# EAGLE board APRS board R2 (EAGLE 6.4)
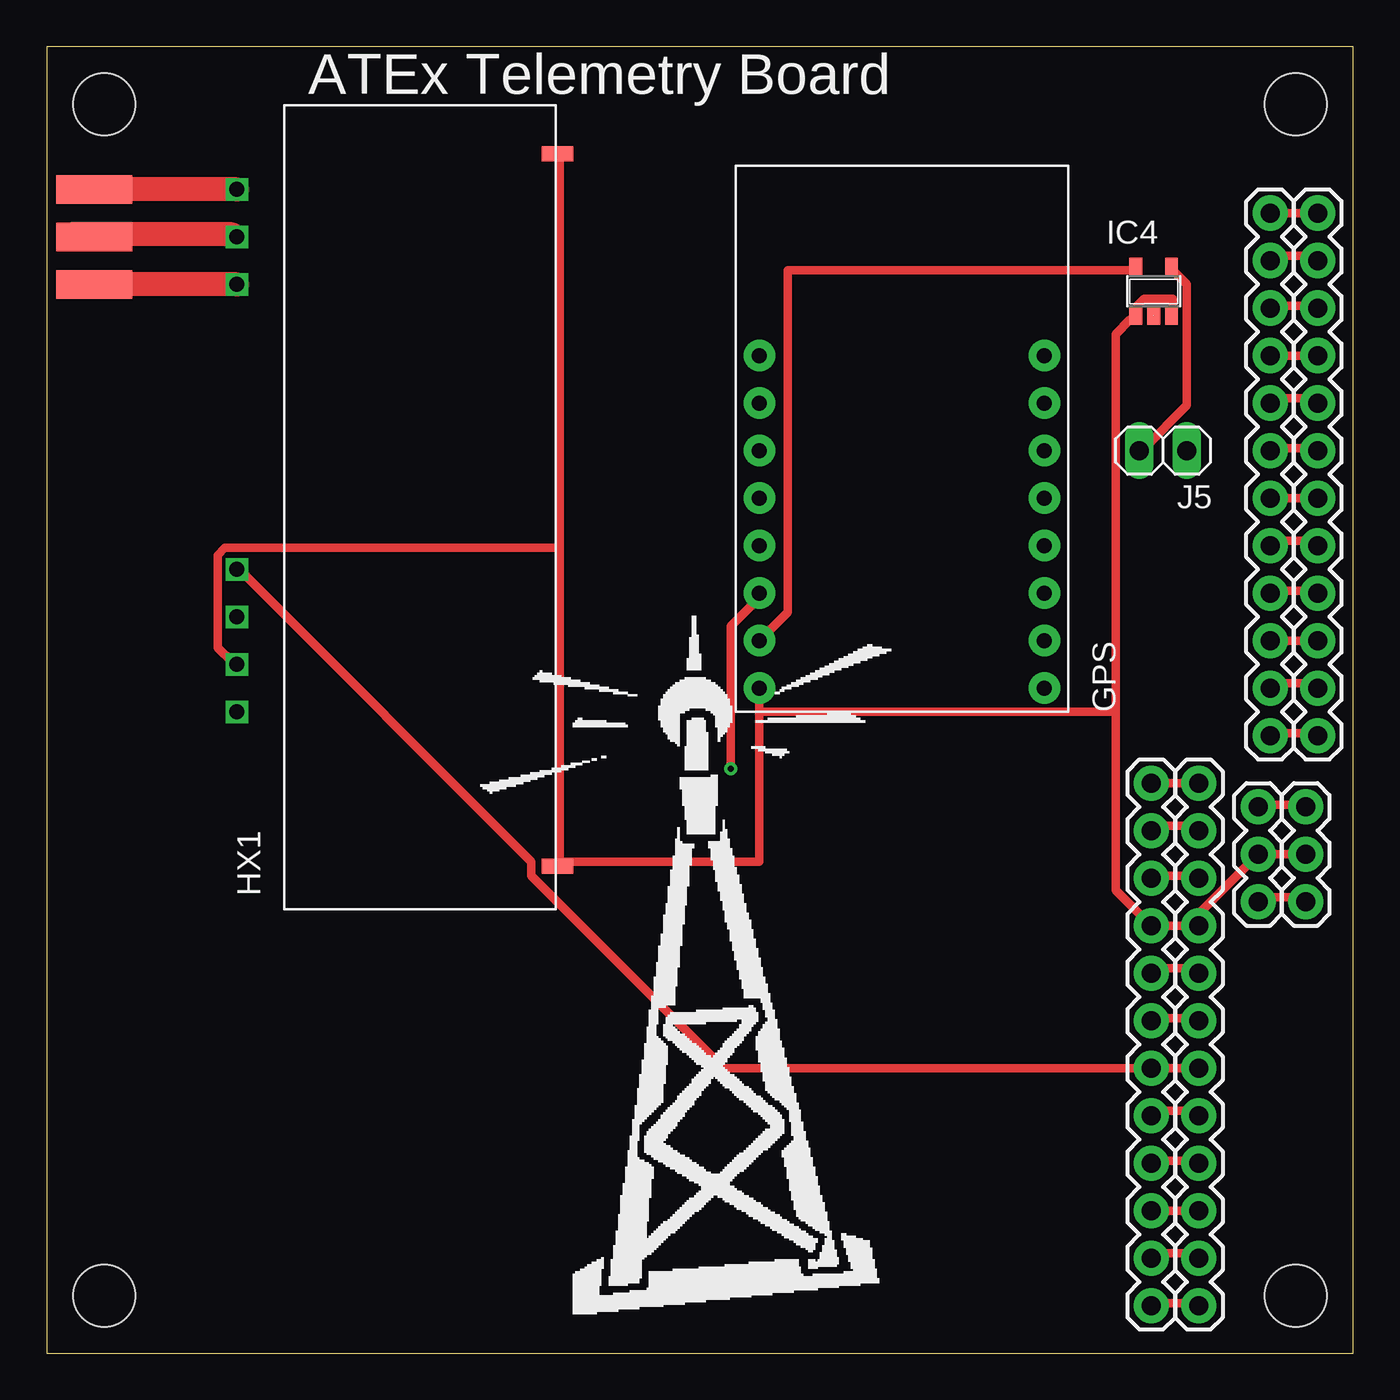
[diagram p0: board, top side]
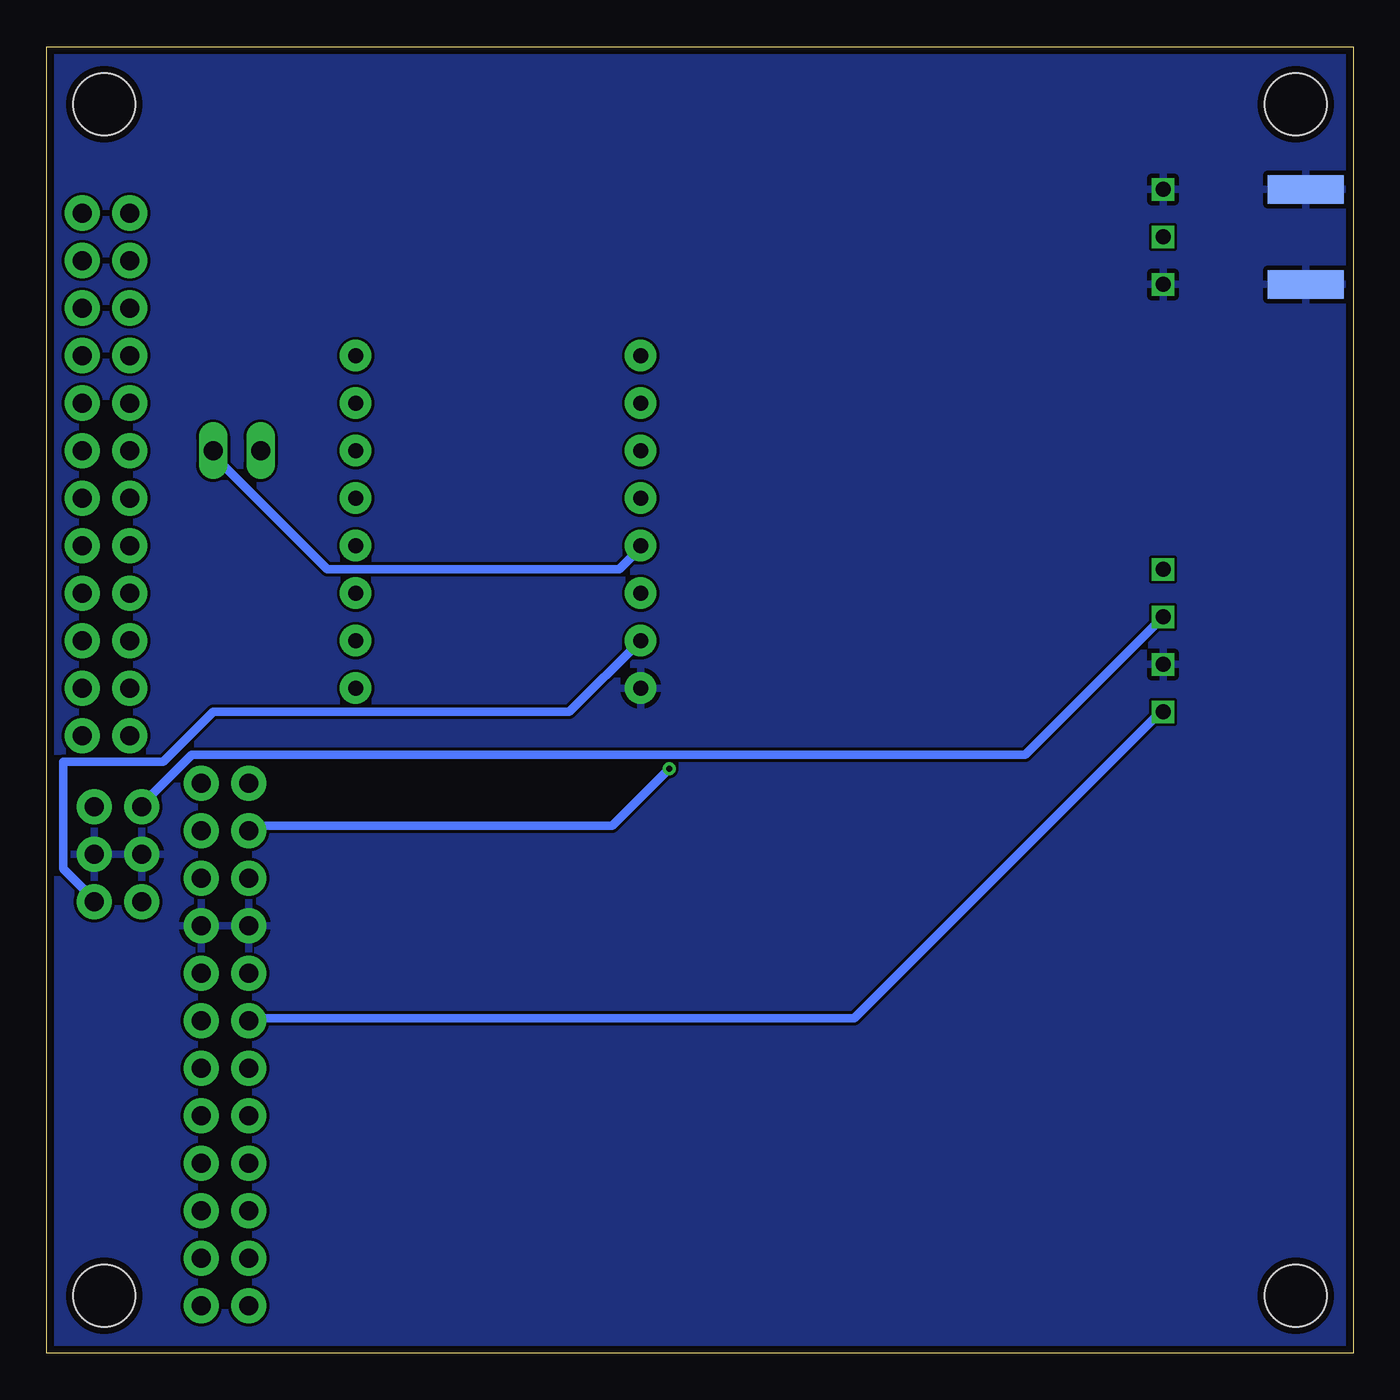
[diagram p1: board, bottom side, seen from below]

Size 69.85 x 69.85 mm. Coordinates in mm from the lower left corner, seen from the top.
Outline: 0,0 69.85,0 69.85,69.85 0,69.85 0,0
Copper layers (1*16): Top 0.0356mm / dielectric 1.5011mm / Bottom 0.0356mm
Design rules "OSHpark *": minimum track width 18mil, minimum drill 13mil, track to track 6mil, track to pad 6mil, pad to pad 6mil, via to via 6mil, smd to smd 6mil, copper to edge 15mil, drill to drill 6mil, minimum pad ring 7mil, minimum via ring 7mil, stop-mask expansion 4mil, vias tented up to drill 0mil, thermal gap 10mil
Net classes: 1 vcc: width 0.254 mm; 2 20: width 0.508 mm; 3 30: width 0.762 mm

## Footprints (pad centres in the part's own frame; a part is rotated, then mirrored left to right if it is on the bottom)
VENUS638FLPX = drill 0.8 pad 1.676: 3.3V 3.81,16.51; CLK 13.97,16.51; CS 11.43,16.51; GND 1.27,16.51; GND2 3.81,1.27; MISO 16.51,16.51; MOSI 19.05,16.51; NAV 6.35,1.27; PPS 8.89,1.27; RX0 8.89,16.51; RX1 11.43,1.27; SCL 16.51,1.27; SDA 19.05,1.27; TX0 6.35,16.51; TX1 13.97,1.27; VBAT 1.27,1.27
SOT23-5 = smd 0.69 x 0.99: 1 -0.95,-1.29; 2 0,-1.29; 3 0.95,-1.29; 4 0.95,1.3; 5 -0.95,1.3
1X02 = drill 1.016 long: 1 -1.27,0; 2 1.27,0
SMA-EDGE = smd 1.524 x 4.064: GND@0 0,0; GND@1 5.08,0; SIG 2.54,0 | smd 1.524 x 4.064 bottom: GND@2 0,0; GND@3 5.08,0
1X12 = drill 1.016 pad 1.88: 1 0,0; 2 2.54,0; 3 5.08,0; 4 7.62,0; 5 10.16,0; 6 12.7,0; 7 15.24,0; 8 17.78,0; 9 20.32,0; 10 22.86,0; 11 25.4,0; 12 27.94,0
HX1 = drill 0.8 square: 0V 25.4,-8.89; EN 20.32,-8.89; RFGND1 0,-8.89; RFGND2 5.08,-8.89; RFOUT 2.54,-8.89; TXD 27.94,-8.89; VCC 22.86,-8.89 | smd 0.813 x 1.676: BODYGND1 -1.905,8.255; BODYGND2 36.195,8.255
1X03 = drill 1.016 pad 1.88: 1 0,0; 2 2.54,0; 3 5.08,0
STAND-OFF = hole 3.302: 0,0

## Placement (x,y rotation side)
GPS  VENUS638FLPX  [VENUS638FLPX]  54.61,34.29 90 top
IC4  ON M74VHC1GT125DT1G  [SOT23-5]  59.18,56.77 0 top
J5  J5MM  [1X02]  59.69,48.26 180 top
J$1  SMA_EDGE  [SMA-EDGE]  2.54,57.15 90 top
JP1  [1X12]  59.05,2.54 90 top
JP4  [1X12]  67.94,33.02 90 top
JP7  [1X12]  61.59,2.54 90 top
JP8  [1X12]  65.41,33.02 90 top
M2  HX1  [HX1]  19.05,62.23 270 top
POWERCONNECTION  [1X03]  64.77,24.13 90 top
POWERCONNECTION1  [1X03]  67.31,24.13 90 top
STANDOFF1  STAND-OFF  [STAND-OFF]  66.78,3.07 0 top
STANDOFF2  STAND-OFF  [STAND-OFF]  66.78,66.78 0 top
STANDOFF3  STAND-OFF  [STAND-OFF]  3.07,66.78 0 top
STANDOFF4  STAND-OFF  [STAND-OFF]  3.07,3.07 0 top

## Library data of the parts
GPS M2 = trackuino
IC4 = 74xx-little-us
J5 = pinhead
J$1 POWERCONNECTION POWERCONNECTION1 = SparkFun-Connectors
JP1 JP4 JP7 JP8 = SparkFun
STANDOFF1-STANDOFF4 = SparkFun-Electromechanical

## Nets
+3V3: GPS.3.3V IC4.5 POWERCONNECTION1.1 POWERCONNECTION.1
+5V: M2.VCC POWERCONNECTION1.3 POWERCONNECTION.3
A0: JP4.8 JP8.8
A1: JP4.7 JP8.7
A2: JP4.6 JP8.6
A3: JP4.5 JP8.5
A4: JP4.2 JP8.2
A5: JP4.1 JP8.1
A6: JP4.4 JP8.4
A7: JP4.3 JP8.3
D2: JP1.8 JP7.8
D3: JP1.7 JP7.7 M2.TXD
D4: JP1.6 JP7.6 M2.EN
D5: JP1.5 JP7.5
D6: JP1.4 JP7.4
D7: JP1.3 JP7.3
D8: JP1.2 JP7.2
D9: JP1.1 JP7.1
D10: JP4.12 JP8.12
GND [vcc]: GPS.GND IC4.1 IC4.3 J$1.GND@0 J$1.GND@1 J$1.GND@2 J$1.GND@3 JP1.9 JP7.9 M2.0V M2.BODYGND1 M2.BODYGND2 M2.RFGND1 M2.RFGND2 POWERCONNECTION1.2 POWERCONNECTION.2
MISO: JP4.10 JP8.10
MOSI: JP4.11 JP8.11
N$2: GPS.RX0 J5.1
RESET: JP1.10 JP7.10
RFOUT [20]: J$1.SIG M2.RFOUT
RXI: GPS.TX0 JP1.11 JP7.11
SCK: JP4.9 JP8.9
TX: IC4.2
TX-3V3: IC4.4 J5.2
TXO: JP1.12 JP7.12

## Tracks (layer width: path | path; a pad name or v marks a point on that pad's centre or on a via)
+3V3
  Top 0.457: POWERCONNECTION.1 64.77,24.38 67.06,24.38 POWERCONNECTION1.1 | GPS.3.3V 39.62,39.62 39.62,57.91 57.91,57.91 IC4.5
  Bottom 0.457: GPS.3.3V 41.91,34.29 60.96,34.29 63.63,31.62 68.96,31.62 68.96,25.91 67.44,24.38 POWERCONNECTION1.1
+5V
  Top 0.457: POWERCONNECTION1.3 67.06,29.34 64.77,29.34 POWERCONNECTION.3
  Bottom 0.457: M2.VCC 17.53,32 62.1,32 64.77,29.34 POWERCONNECTION.3
A0
  Top 0.457: JP8.8 65.53,51.05 67.82,51.05 JP4.8
A1
  Top 0.457: JP8.7 65.53,48.39 67.82,48.39 JP4.7
A2
  Top 0.457: JP4.6 JP8.6
A3
  Top 0.457: JP8.5 65.53,43.43 67.82,43.43 JP4.5
A4
  Top 0.457: JP8.2 65.53,35.81 67.82,35.81 JP4.2
A5
  Top 0.457: JP8.1 65.53,33.15 67.82,33.15 JP4.1
A6
  Top 0.457: JP8.4 65.53,40.77 67.82,40.77 JP4.4
A7
  Top 0.457: JP4.3 JP8.3
D2
  Top 0.457: JP1.8 59.05,20.57 61.34,20.57 JP7.8
D3
  Top 0.457: JP7.7 61.34,17.91 59.05,17.91 JP1.7
  Bottom 0.457: M2.TXD 10.29,34.29 26.67,17.91 59.05,17.91 JP1.7
D4
  Top 0.457: JP7.6 JP1.6 36.2,15.24 25.91,25.53 25.91,26.29 10.29,41.91 M2.EN
D5
  Top 0.457: JP1.5 59.05,12.95 61.34,12.95 JP7.5
D6
  Top 0.457: JP1.4 59.05,10.29 61.34,10.29 JP7.4
D7
  Top 0.457: JP7.3 JP1.3
D8
  Top 0.457: JP1.2 59.05,5.33 61.34,5.33 JP7.2
D9
  Top 0.457: JP1.1 59.05,2.67 61.34,2.67 JP7.1
D10
  Top 0.457: JP4.12 JP8.12
GND
  Top 0.457: POWERCONNECTION1.2 POWERCONNECTION.2 61.72,23.62 61.72,22.86 JP7.9 JP1.9 57.15,24.77 57.15,34.29 | IC4.3 60.2,55.63 60.2,56.39 58.67,56.39 58.29,56.01 58.29,55.63 IC4.1 57.91,55.24 57.15,54.48 57.15,34.29 | 27.43,26.29 38.1,26.29 38.1,34.29 | GPS.GND 38.1,34.29 | 27.43,26.29 27.43,43.05 | 27.43,43.05 27.43,64.01 M2.BODYGND1 | 27.43,26.29 M2.BODYGND2 | 27.43,43.05 9.53,43.05 9.14,42.67 9.14,37.72 9.91,36.96 M2.0V | 38.1,34.29 57.15,34.29 | J$1.GND@1 2.67,62.48 9.91,62.48 M2.RFGND1
  Top 1.27: M2.RFGND2 J$1.GND@2 | M2.RFGND1 J$1.GND@1
  pour Bottom: 0,69.85 0,0 69.85,0 69.85,69.85
MISO
  Top 0.457: JP8.10 65.53,56.01 67.82,56.01 JP4.10
MOSI
  Top 0.457: JP8.11 65.53,58.67 67.82,58.67 JP4.11
N$2
  Bottom 0.457: J5.1 60.96,48.01 54.86,41.91 39.24,41.91 38.1,43.05 GPS.RX0
RESET
  Top 0.457: JP1.10 59.05,25.53 61.34,25.53 JP7.10
RFOUT
  Top 0.508: M2.RFOUT 10.29,59.82 9.91,59.82 | 2.67,59.82 J$1.SIG
  Top 1.27: 9.91,59.82 2.67,59.82 1.27,59.82
RXI  (via drill 0.33)
  Top 0.457: JP1.11 59.05,28.19 61.34,28.19 JP7.11 | v36.58,31.24 36.58,38.86 38.1,40.39 GPS.TX0
  Bottom 0.457: v36.58,31.24 39.62,28.19 59.05,28.19 JP1.11
SCK
  Top 0.457: JP4.9 JP8.9
TX-3V3
  Top 0.457: IC4.4 60.2,57.91 60.96,57.15 60.96,50.67 58.67,48.39 J5.2
TXO
  Top 0.457: JP7.12 JP1.12

## Text on the board
tNames: ATEx Telemetry Board